# Altium PCB minireg-xcl247.PcbDoc
Units mm, origin at the board's own origin, x right, y up, seen from the top; angles counter-clockwise.
Board outline 10 x 10 mm, 4 copper layers (Top Layer, Mid-Layer 1, Mid-Layer 2, Bottom Layer); 10 components, 6 nets, 67 pads, 23 vias.
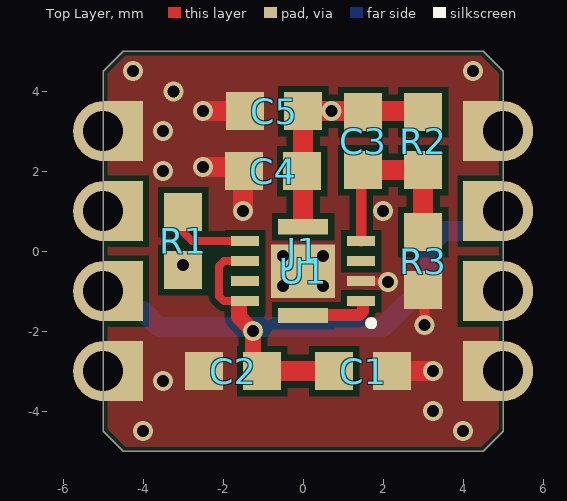
[diagram p0: Top Layer view]
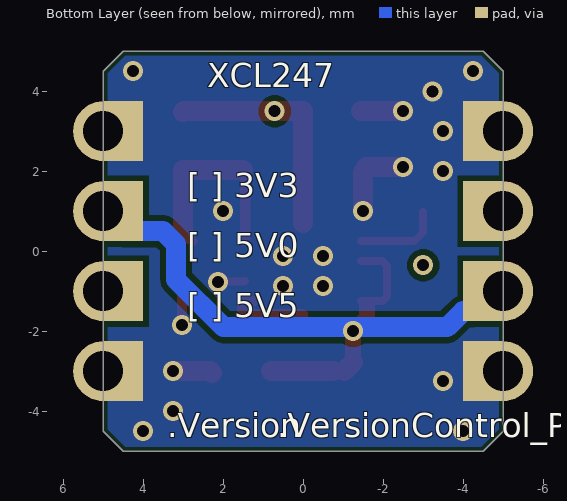
[diagram p1: Bottom Layer view, seen from below]
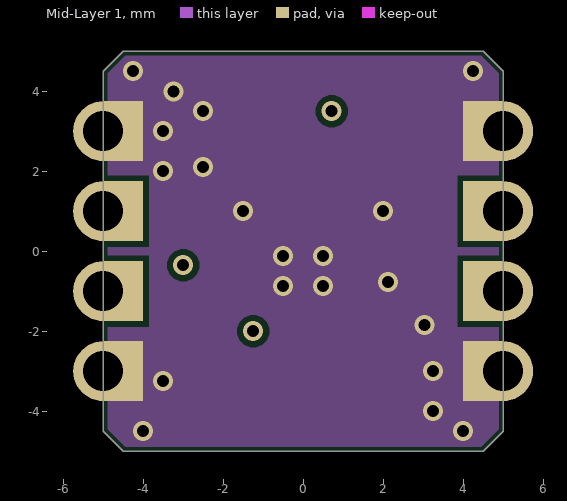
[diagram p2: Mid-Layer 1]
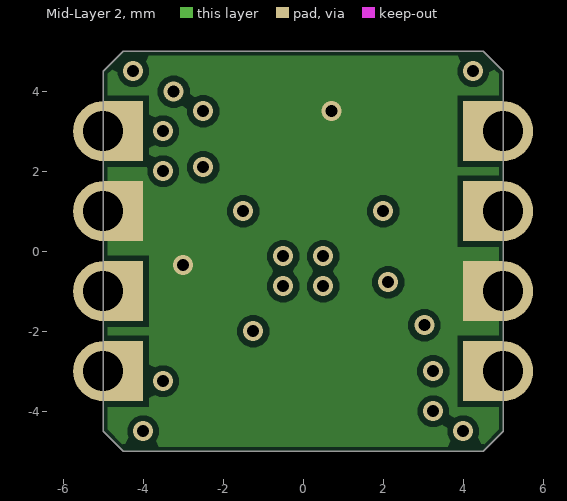
[diagram p3: Mid-Layer 2]
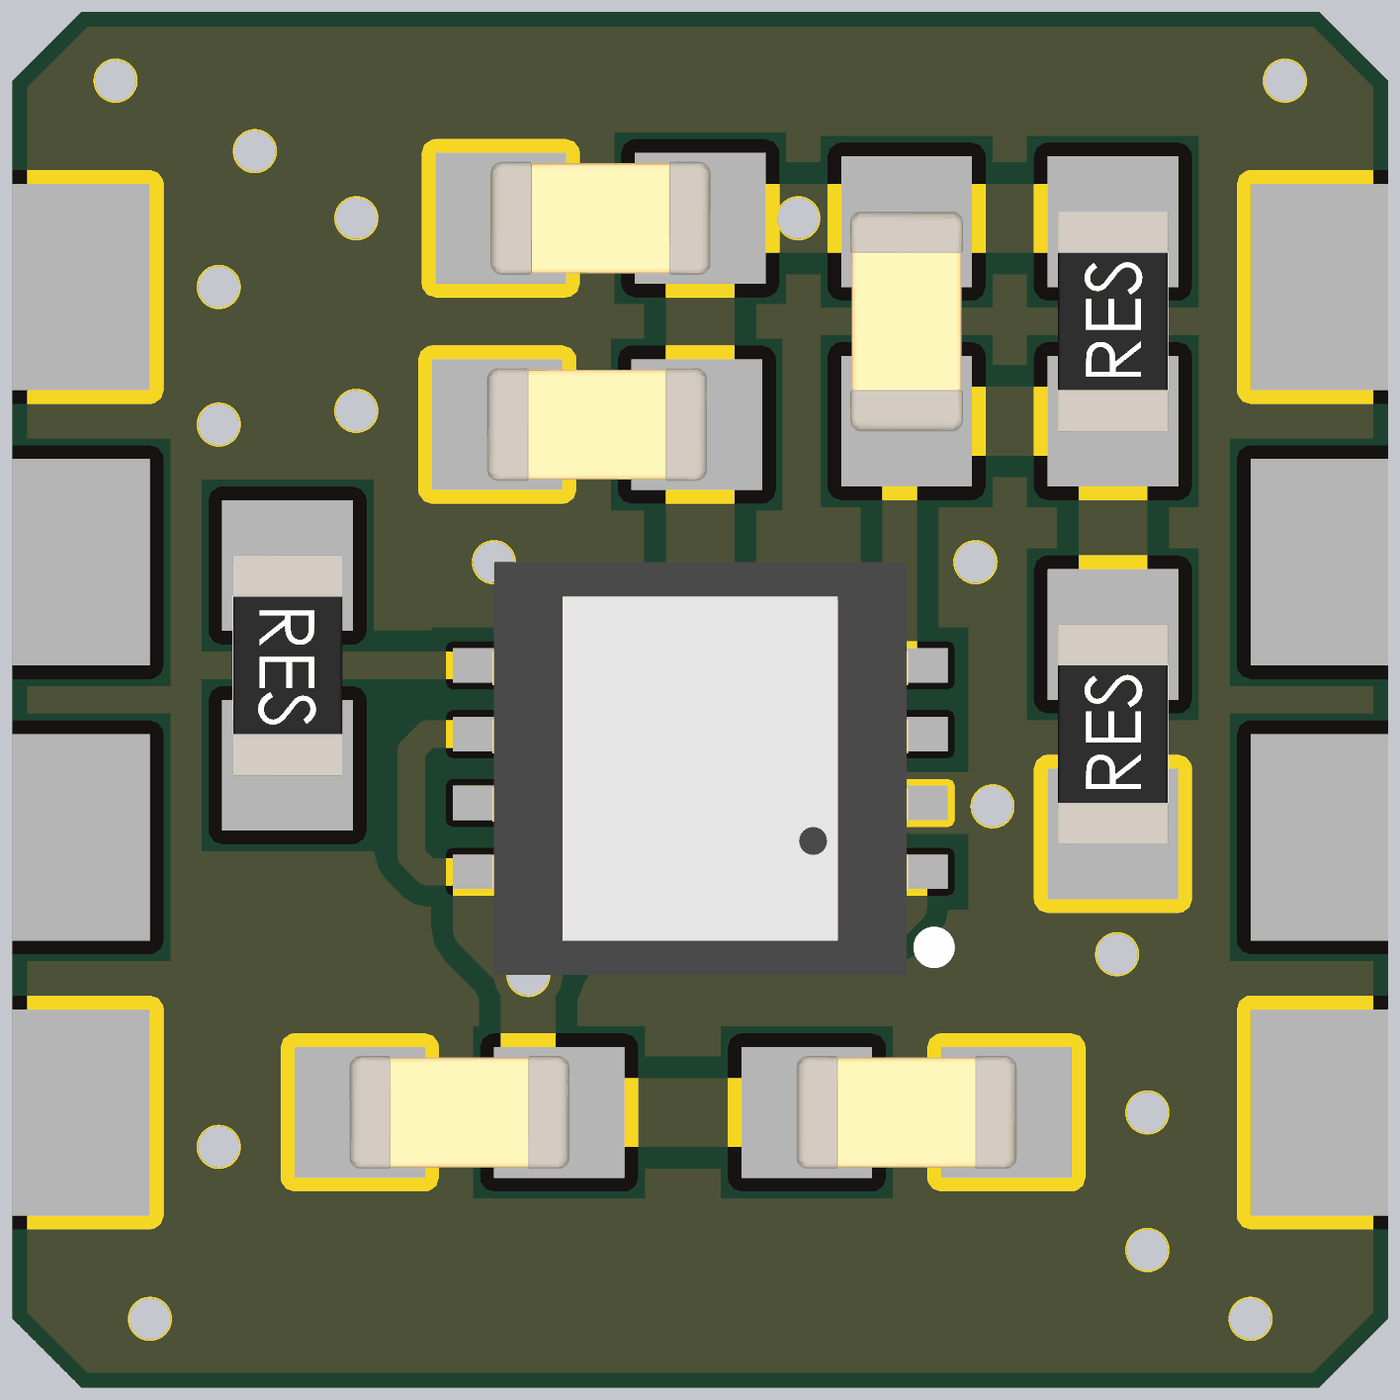
[diagram p4: 3D render of the assembled board from above, using the file's embedded part models]

## Layer stack, top to bottom
Top Solder: solder mask 0.0102, Solder Resist, Dk 3.5
Top Layer: signal copper 0.0356
Dielectric 1: dielectric 0.32, FR-4, Dk 4.8
Mid-Layer 1: signal copper 0.0356
Dielectric2: dielectric 0.32, FR-4, Dk 4.8
Mid-Layer 2: signal copper 0.0356
Dielectric3: dielectric 0.32, FR-4, Dk 4.8
Bottom Layer: signal copper 0.0356
Bottom Solder: solder mask 0.0102, Solder Resist, Dk 3.5

## Board outline
-5,-4.5 -5,4.5 -4.5,5 4.5,5 5,4.5 5,-4.5 4.5,-5 -4.5,-5

## Design rules (kind name [scope] priority, off if disabled: settings)
BoardOutlineClearance [IsPoly] p1: gap=0.1 ignorepadtopadclearanceinfootprint=FALSE
Clearance [All] p1: gap=0.15 ignorepadtopadclearanceinfootprint=FALSE
ComponentClearance ComponentClearance_1 [HasFootprint('MINIREG10x10')] p1: gap=0 collisioncheckmode=3 verticalgap=2540 showdistances=FALSE
ComponentClearance [All] p2: gap=0.254 collisioncheckmode=3 verticalgap=0.254 showdistances=FALSE
HoleSize [All] p1: absolutevalues=TRUE maxlimit=5 minlimit=0.3 maxpercent=80.000 minpercent=20.000
MinimumAnnularRing [All] p1: minimumring=0.1
MinimumSolderMaskSliver [All] p1: minsoldermaskwidth=0.1
PasteMaskExpansion [All] p1: expansion=0 percent=-10.000000
PolygonConnect PolygonConnect_1 [IsVia] p1: connectstyle=Direct reliefconductorwidth=0.254 reliefentries=4 polygonreliefangle="90 Angle" airgapwidth=0.254
PolygonConnect [All] p2: connectstyle=Direct reliefconductorwidth=0.254 reliefentries=4 polygonreliefangle="90 Angle" airgapwidth=0.254
RoutingVias [All] p1: holewidth=0.711 width=0.3 viastyle="Through Hole" minholewidth=0.711 minwidth=0.2 maxholewidth=0.711 maxwidth=1
SilkToSolderMaskClearance [IsPad] p1: minsilkscreentomaskgap=0.15 clearancetoexposedcopper=TRUE
SolderMaskExpansion [All] p1: expansion=0.1 istentingtop=FALSE
SupplyNets "Schematic Supply Nets_4" [InNet('VOUT')] p1: voltage=0.000
SupplyNets "Schematic Supply Nets_3" [InNet('VIN')] p2: voltage=0.000
SupplyNets "Schematic Supply Nets_2" [InNet('GND')] p3: voltage=0.000
Width [All] p1: maxlimit=0.5 minlimit=0.15 preferedwidth=0.2
25 further rules are at their usual default settings.

## Components (designator, comment, footprint, x,y, rotation, side; value= is the part's Value field where it differs from the comment)
C1 "CAP" CAP0603 1.5,-3 r180 top value=2.2uF
C2 "CAP" CAP0603 -1.75,-3 r0 top value=100nF
C3 "CAP" CAP0603 1.5,2.75 r90 top value=12pF
C4 "CAP" CAP0603 -0.75,2 r0 top value=10uF
C5 "CAP" CAP0603 -0.725,3.5 r0 top value=10uF
J1 "MINIREG10x10" MINIREG8_10x10R 0,0 r0 top locked
R1 "RES" RES0603 -3,0.25 r270 top value=100K
R2 "RES" RES0603 3,2.75 r90 top value=820K
R3 "RES" RES0603 3,-0.25 r90 top value=130K
U1 "XCL247" "TOREX DFN3030-10B" 0,-0.5 r90 top

## Footprints (in the part's own frame and the unit in brackets; to place one, negate y for a bottom-side part, rotate by r counter-clockwise, add the part's x,y. Pads: shape width x height; smd on the part's side, far side on the other; paste and mask are expansions set on the pad)
CAP0603 [mm]
  rect 0.95x0.95 smd: 1(-0.725,0) 2(0.725,0)
  body extent -0.8,-0.41 0.8,0.41, height 0.57
MINIREG8_10x10R [mm] "8-pin 10x10mm castellated regulator footprint"
  round 1.5 hole 1: 1(-5,-3) 2(-5,-1) 3(-5,1) 4(-5,3) 5(5,3) 6(5,1) 7(5,-1) 8(5,-3)
  rect 1x1.5 smd: 1(-4.5,-3) 2(-4.5,-1) 3(-4.5,1) 4(-4.5,3) 5(4.5,3) 6(4.5,1) 7(4.5,-1) 8(4.5,-3)
  rect 1x1.5 on Mid1: 1(-4.5,-3) 2(-4.5,-1) 3(-4.5,1) 4(-4.5,3) 5(4.5,3) 6(4.5,1) 7(4.5,-1) 8(4.5,-3)
  rect 1x1.5 smd far side: 1(-4.5,-3) 2(-4.5,-1) 3(-4.5,1) 4(-4.5,3) 5(4.5,3) 6(4.5,1) 7(4.5,-1) 8(4.5,-3)
  rect 1x1.5 on Mid2: 1(-4.5,-3) 2(-4.5,-1) 3(-4.5,1) 4(-4.5,3) 5(4.5,3) 6(4.5,1) 7(4.5,-1) 8(4.5,-3)
RES0603 [mm]
  rect 0.95x0.95 smd: 1(-0.725,0) 2(0.725,0)
  body extent -0.8,-0.4 0.8,0.4, height 0.3
"TOREX DFN3030-10B" [mm] "TOREX DFN3030-10B"
  rect 1.34x1.6 smd paste-2539.97 mask+0.05: 0(0,0)
  rect 0.25x0.7 smd mask+0.05: 1(-0.75,-1.45) 2(-0.25,-1.45) 3(0.25,-1.45) 4(0.75,-1.45) 5(0.75,1.45) 6(0.25,1.45) 7(-0.25,1.45) 8(-0.75,1.45)
  rect 0.38x1.25 smd mask+0.05: 9(-1.11,0) 10(1.11,0)
  silkscreen extent -1.37,-1.78 -1.23,-1.63, body extent -1.5,-1.51 1.5,1.51, height 1.65

## Part data
C1: library part CAP-SM-0603-X5R-2.2uF, "CAP SM 0603 X5R 2.2uF", Manufacturer=GENERIC, Package=0603, Part Number=CAP-SM-0603-X5R-2.2uF
C2: library part CAP-SM-0603-X7R-100nF, "CAP SM 0603 X7R 100nF", Manufacturer=GENERIC, Package=0603, Part Number=CAP-SM-0603-X7R-100nF
C3: library part CAP-SM-0603-NP0-12pF, "CAP SM 0603 NP0 12pF", Manufacturer=GENERIC, Package=0603, Part Number=CAP-SM-0603-NP0-12pF
C4 C5: library part CAP-SM-0603-X5R-10uF, "CAP SM 0603 X5R 10uF", Manufacturer=GENERIC, Package=0603, Part Number=CAP-SM-0603-X5R-10uF
R1: library part RES-SM-0603-100K, "RES SM 0603 100K", Manufacturer=GENERIC, Package=0603, Part Number=RES-SM-0603-100K
R2: library part RES-SM-0603-820K, "RES SM 0603 820K", Manufacturer=GENERIC, Package=0603, Part Number=RES-SM-0603-820K
R3: library part RES-SM-0603-130K, "RES SM 0603 130K", Manufacturer=GENERIC, Package=0603, Part Number=RES-SM-0603-130K

## Via types
v1: diameter 0.5, hole 0.3, Top Layer to Bottom Layer, tented both sides, 23 vias

## Nets (pads, with @x,y where several pads share a name; then routed paths per layer and width w, separated by ;. In a path a pad name is that pad's centre, name@x,y a point inside that pad or via, vN(x,y) a via of type N, cw(c..) or ccw(c..) an arc to the next point about the centre after c; other vN are vias at no path point)
GND: C1.1 C2.1 C4.1 C5.1 J1.1 J1.4 J1.5 J1.8 R3.1 U1.0 U1.2 | length 5.8
  Top Layer w0.2: C4.1@-1.575,2.1 C4.1 C4.1@-1.5,1.975 ; U1.2 1.462,-0.762 2.112,-0.762 v1(2.125,-0.775) ; C1.1 C1.1@2.275,-3.05
  Top Layer w0.254: R3.1 3.03,-1.005 v1(3.03,-1.85)
  Top Layer w0.5: v1(-2.5,2.1) C4.1@-1.575,2.1 ; v1(-2.5,3.5) C5.1 ; v1(-1.5,1) C4.1@-1.5,1.975 ; C1.1@2.275,-3.05 2.325,-3 v1(3.25,-3)
  other v1: -4,-4.5 4,-4.5 3.25,-4 -3.5,-3.25 -0.5,-0.875 0.5,-0.875 -0.5,-0.125 0.5,-0.125 2,1 -3.5,2 -3.5,3 -3.237,3.988 -4.25,4.5 4.25,4.5
NetC3_1: C3.1 R2.1 R3.2 U1.4 | length 5.2
  Top Layer w0.254: U1.4 1.45,1.975 C3.1 ; R3.2@2.775,0.25 R3.2
  Top Layer w0.5: C3.1 R2.1 R3.2
NetR1_1: R1.1 U1.5 | length 2.1
  Top Layer w0.2: R1.1 -3,0.475 -2.775,0.25 U1.5
NetU1_1: U1.1 U1.9 | length 2
  Top Layer w0.254: U1.1@1.227,-1.252 1.229,-1.25 U1.1 1.498,-1.25 U1.1@1.5,-1.252
  Top Layer w0.3: U1.9@0.012,-1.598 1.402,-1.598 1.5,-1.5 U1.1@1.5,-1.352
VIN: C1.2 C2.2 J1.2 J1.6 U1.6 U1.8 | length 17.1
  Top Layer w0.2: U1.8 -1.983,-1.25 -2.1,-1.133 -2.1,-0.367 -1.983,-0.25 U1.6
  Top Layer w0.254: C1.2 C1.2@0.8,-2.975
  Top Layer w0.4: U1.8@-1.6,-1.375 -1.6,-1.65 v1(-1.25,-2) C2.2@-1.25,-2.775
  Top Layer w0.5: C2.2@-1.25,-2.775 C2.2 ; C2.2@-0.75,-3 C1.2 C1.2@0.8,-3
  Bottom Layer w0.5: J1.2@-5,-1 -4.5,-1 -4.5,-1.25 -4.25,-1.5 -4,-1.5 -3.6,-1.9 -1.25,-1.9 1.99,-1.9 3.184,-0.706 3.184,0.184 3.5,0.5 J1.6@4.5,0.5
VOUT: C3.2 C4.2 C5.2 J1.3 J1.7 R1.2 R2.2 U1.10 | length 6.4
  Top Layer w0.254: R1.2 v1(-3,-0.35) ; J1.7@4.275,-1 J1.7@4.763,-1
  Top Layer w0.5: U1.10@0,0.71 C4.2@0,2 ; C4.2@0,2.025 C5.2 v1(0.713,3.5) 2.975,3.5 R2.2
pads on no net: U1.3 U1.7

## Polygon pours and split planes (outlines as drawn)
GND on Mid-Layer 1 "GND_L02_P001" (solid, pour order 1): -4.5,5 -5,4.5 -5,-4.5 -4.5,-5 4.5,-5 5,-4.5 5,4.5 4.5,5
GND on Bottom Layer "GND_L04_P002" (solid, pour order 2): -4.5,5 -5,4.5 -5,-4.5 -4.5,-5 4.5,-5 5,-4.5 5,4.5 4.5,5
VOUT on Mid-Layer 2 "VOUT_L03_P003" (solid, pour order 3): -4.5,5 -5,4.5 -5,-4.5 -4.5,-5 4.5,-5 5,-4.5 5,4.5 4.5,5
GND on Top Layer "GND_L01_P000" (solid, pour order 0): -4.5,5 -5,4.5 -5,-4.5 -4.5,-5 4.5,-5 5,-4.5 5,4.5 4.5,5

## Silkscreen, mask and mechanical layers (free items; w line width, h text height)
Bottom Overlay:
  text "XCL247" at 2.4,4.1 h0.6
  text "[ ] 3V3" at 2.9,1.35 h0.6
  text "[ ] 5V0" at 2.9,-0.15 h0.6
  text "[ ] 5V5" at 2.9,-1.65 h0.6
  text ".VersionControl_ProjFolderRevNumberShort" at 0.65,-4.65 h0.6
  text ".Version" at 3.4,-4.65 h0.6
Mechanical 1:
  the board outline again, w0.1